# Altium PCB RAD-B00-V00.PcbDoc
Units mm, origin at the board's own origin, x right, y up, seen from the top; angles counter-clockwise.
Board outline 220 x 190 mm, 4 copper layers (Top Layer, Layer 1, Layer 2, Bottom Layer), stack 1.782 mm thick; 6 components, 0 nets, 606 pads, 0 vias.
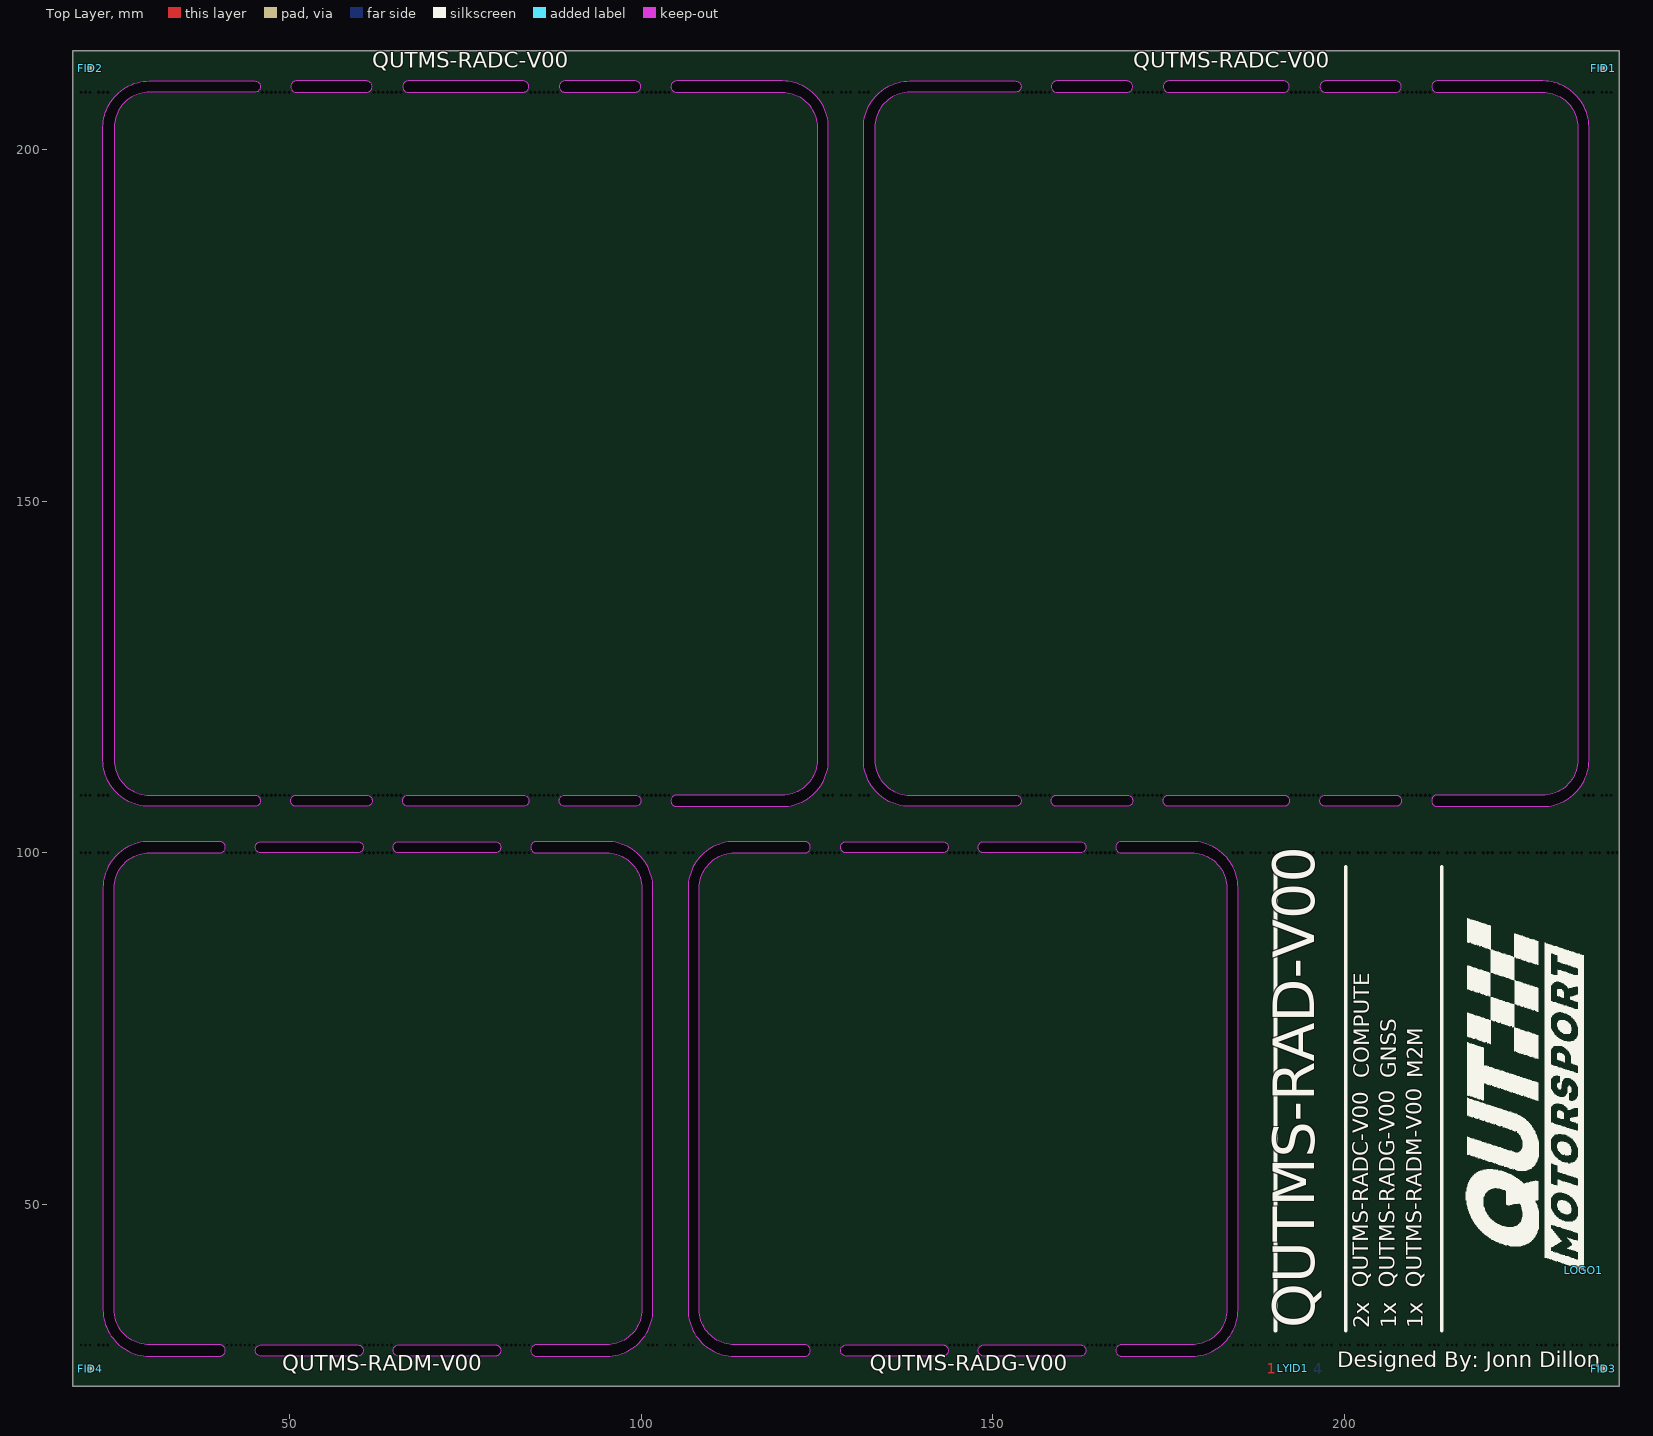
[diagram p0: Top Layer view]
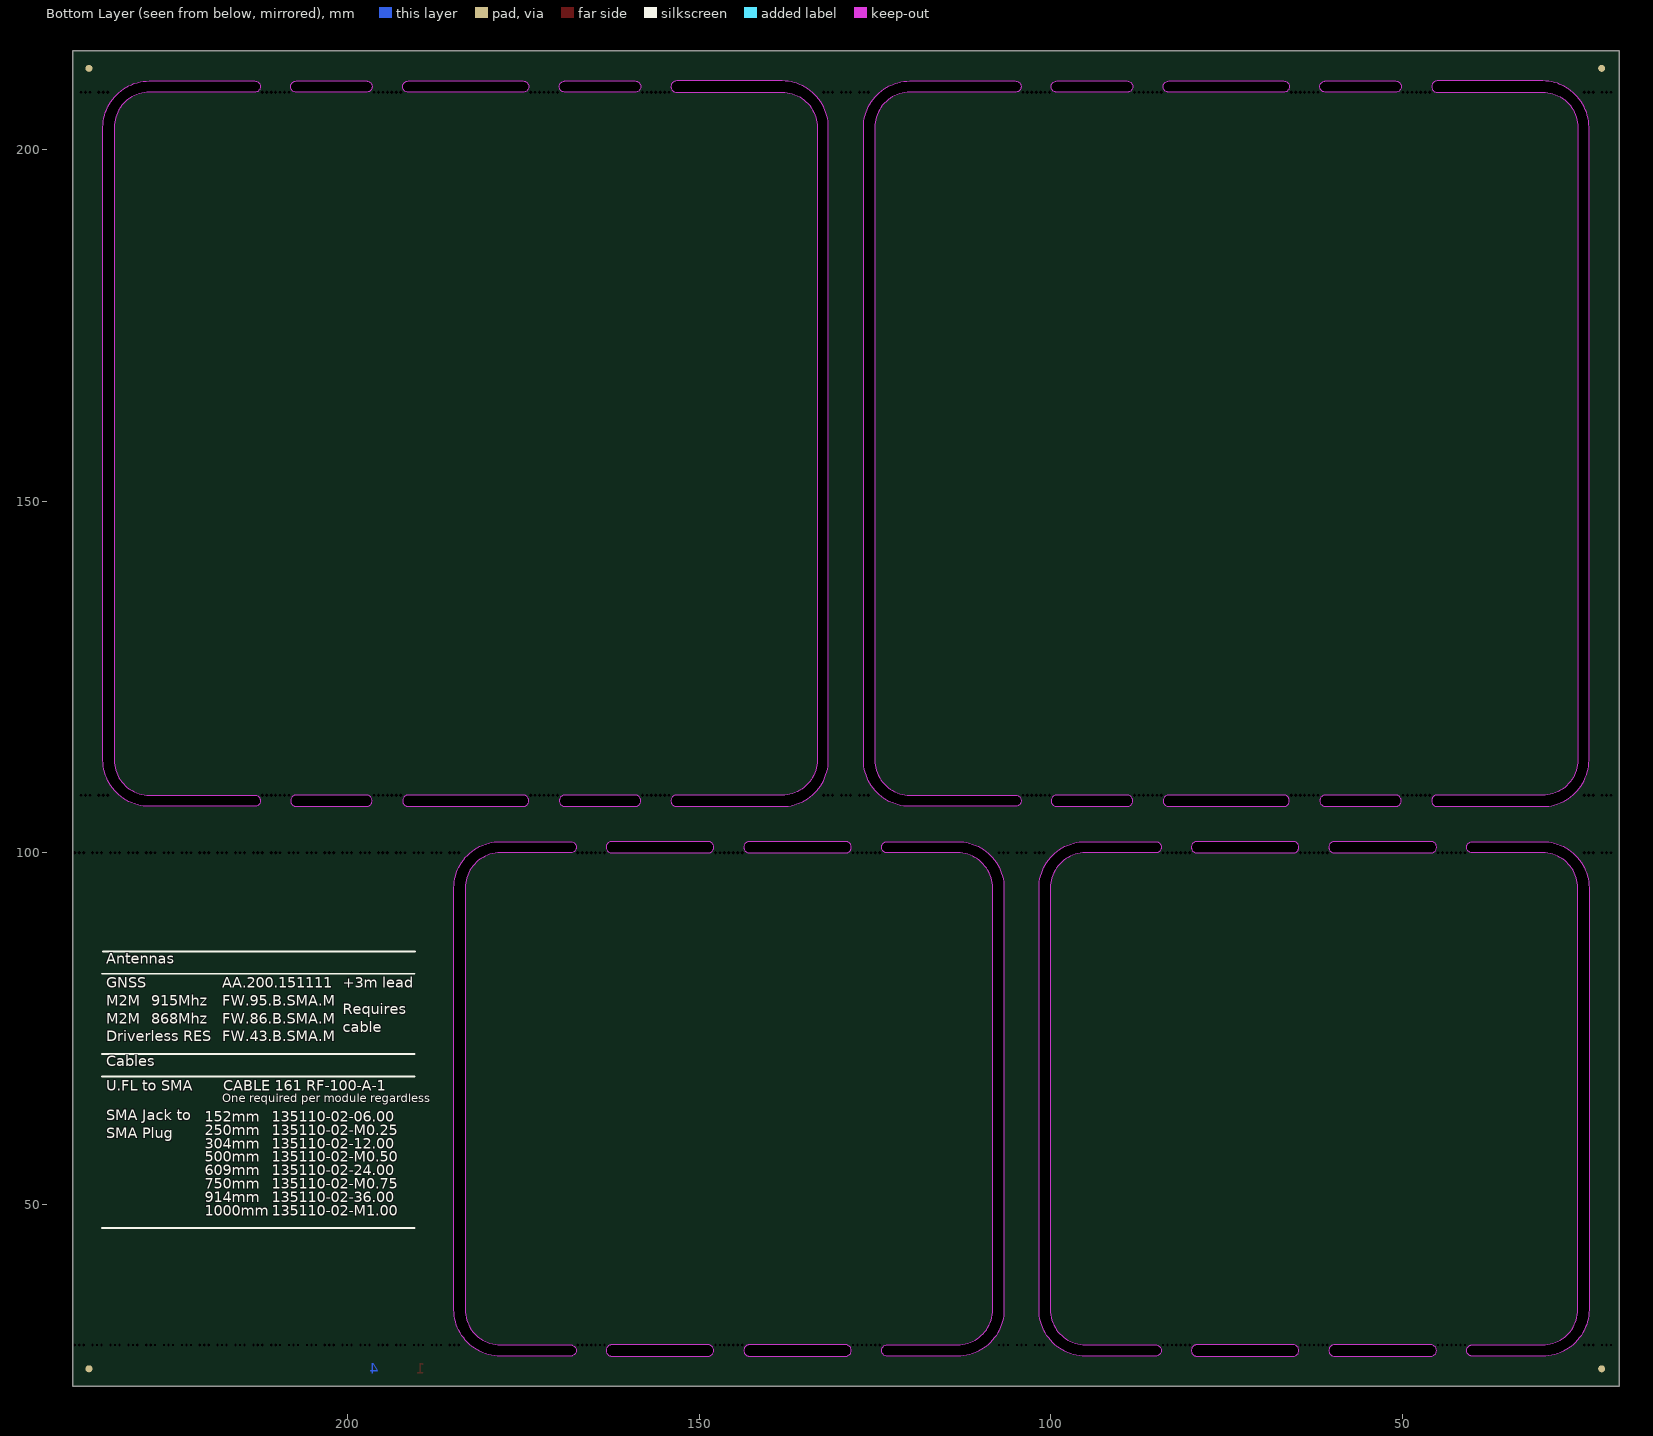
[diagram p1: Bottom Layer view, seen from below]
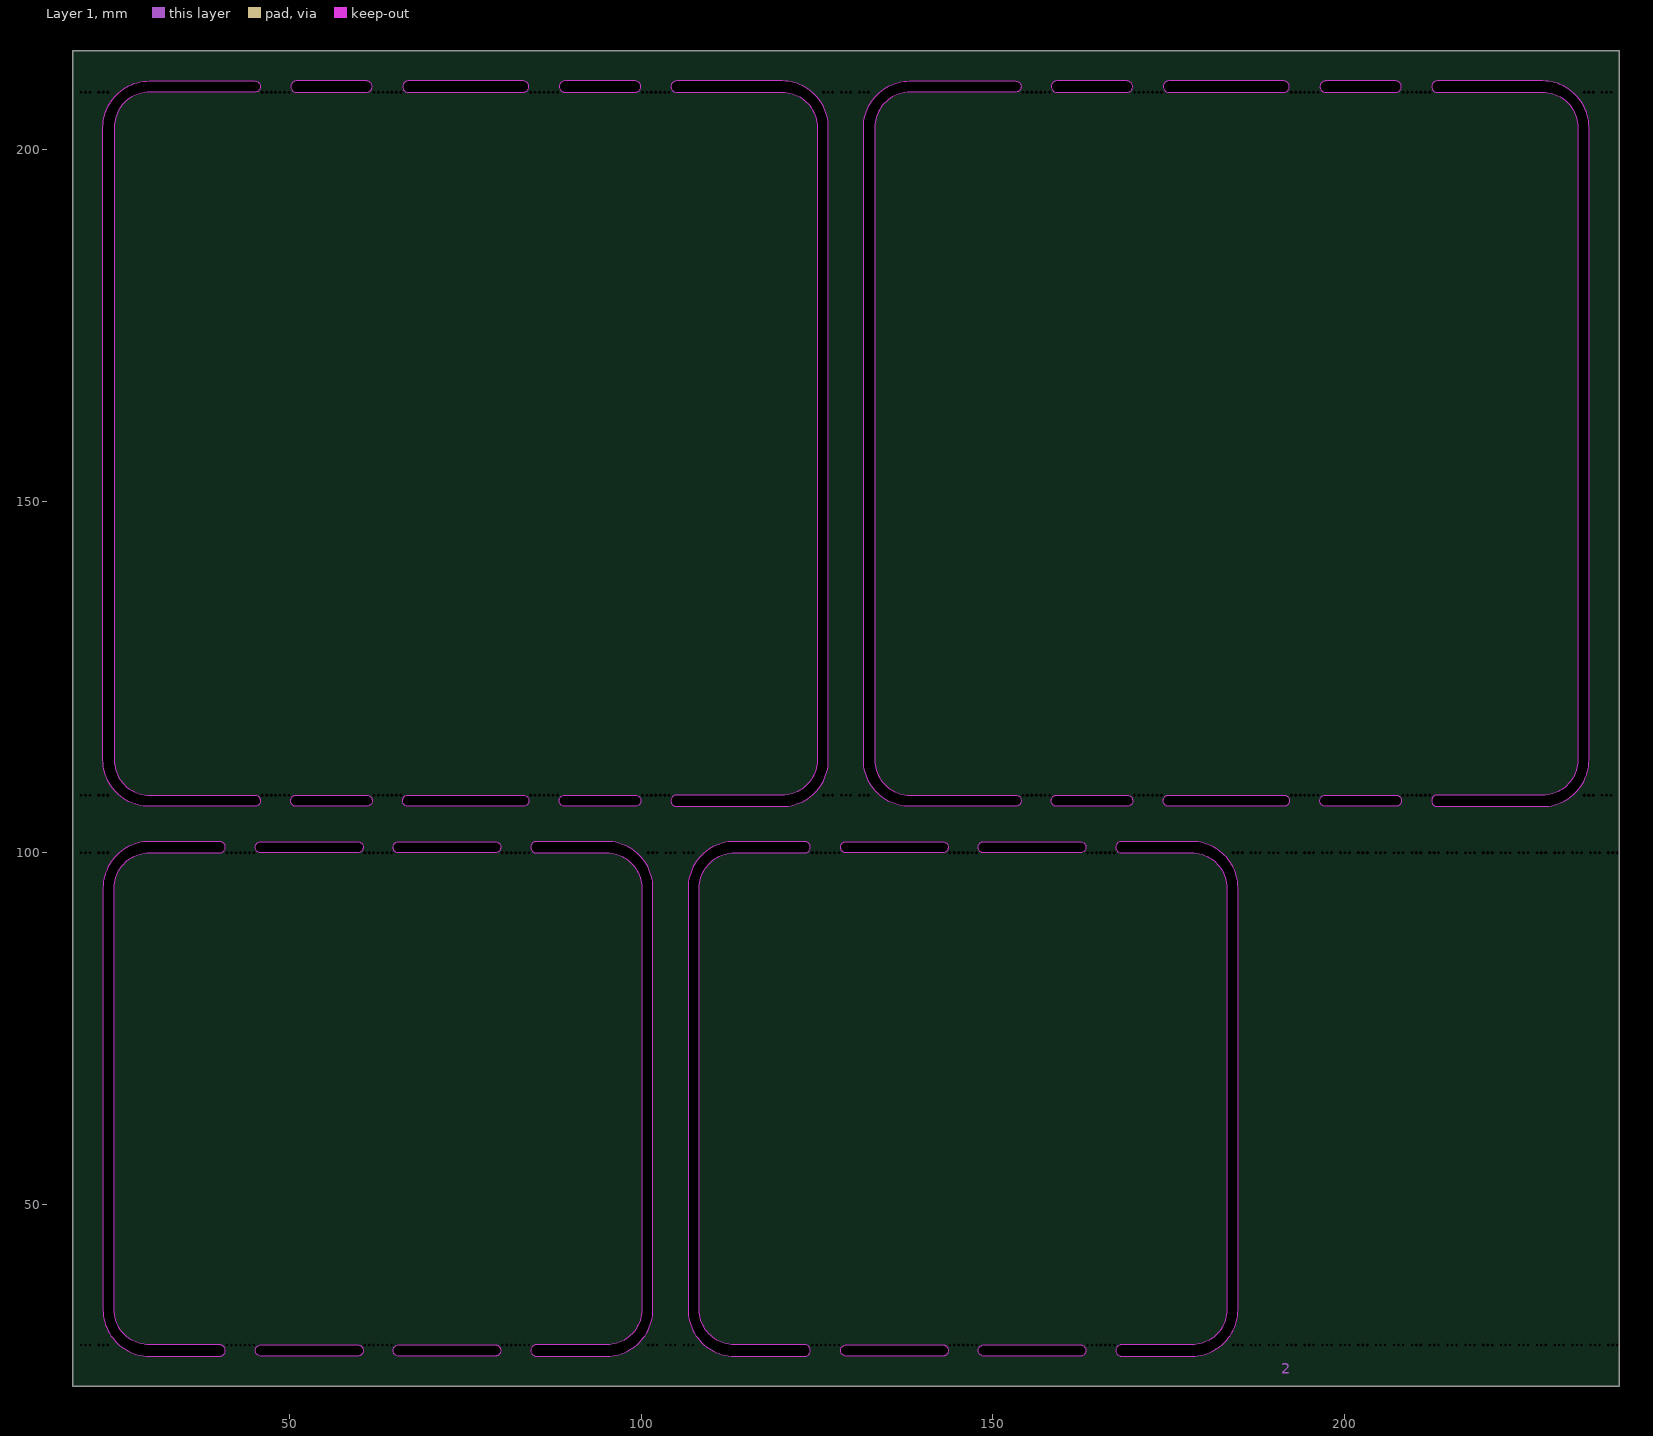
[diagram p2: Layer 1]
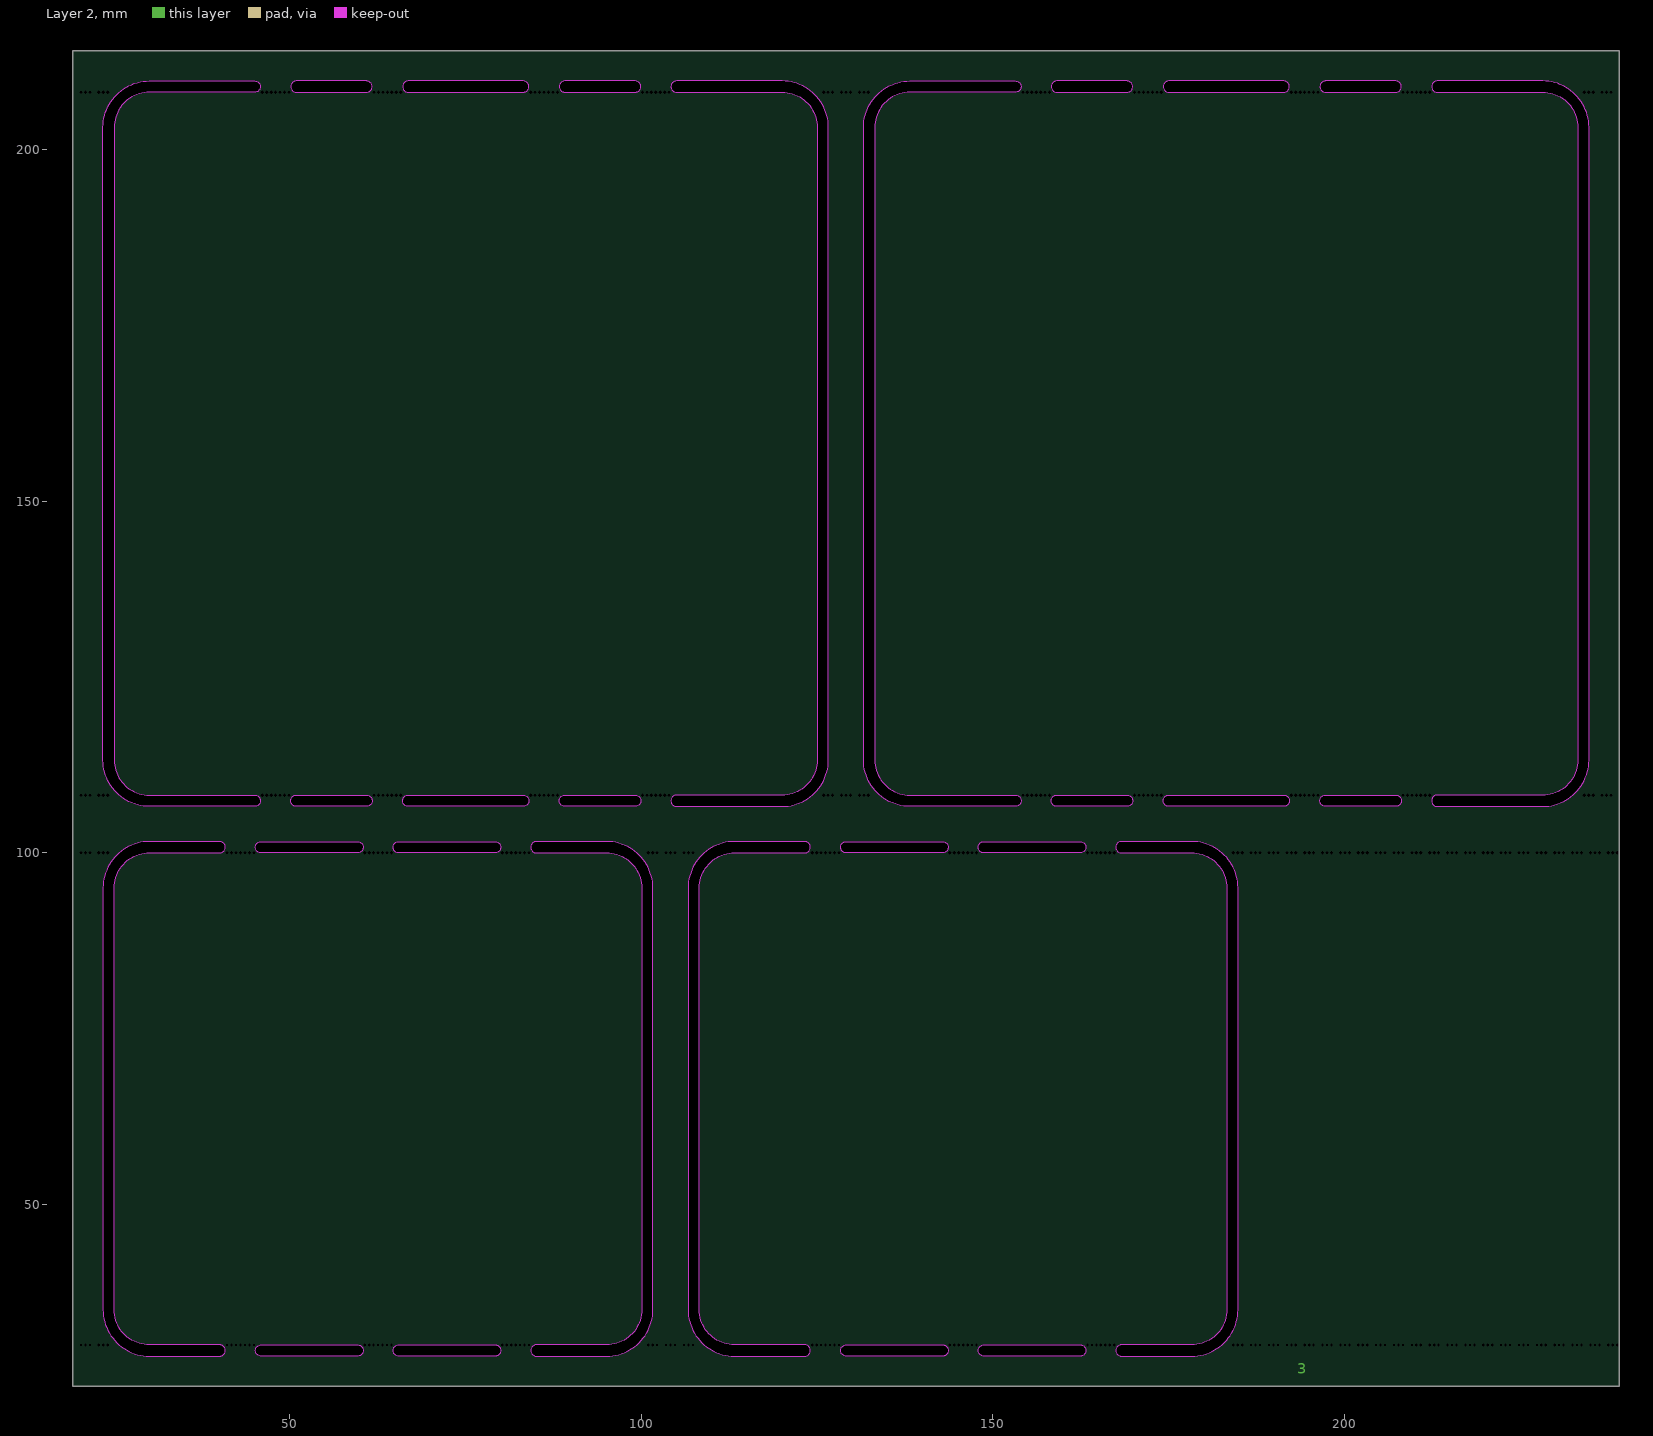
[diagram p3: Layer 2]

## Layer stack, top to bottom
Top Solder: solder mask 0.0102, Solder Resist, Dk 3.5
Top Layer: signal copper 0.0356
Dielectric 2: prepreg 0.0711, PP-006, Dk 4.1
Layer 1: signal copper 0.035
Dielectric 1: core 1.4986, Core-043, Dk 4.3
Layer 2: signal copper 0.035
Dielectric 3: prepreg 0.0711, PP-006, Dk 4.1
Bottom Layer: signal copper 0.0356
Bottom Solder: solder mask 0.0102, Solder Resist, Dk 3.5

## Board outline
19.1,24.1 239.1,24.1 239.1,214.1 19.1,214.1
cut-out: 50.889,209.8 ccw(c50.889,209) 50.889,208.2 60.889,208.2 ccw(c60.889,209) 61.689,209 ccw(c60.889,209) 60.889,209.8
cut-out: 66.815,209.8 ccw(c66.815,209) 66.815,208.2 83.185,208.2 ccw(c83.185,209) 83.985,209 ccw(c83.185,209) 83.185,209.8
cut-out: 89.111,209.8 ccw(c89.111,209) 89.111,208.2 99.111,208.2 ccw(c99.111,209) 99.911,209 ccw(c99.111,209) 99.111,209.8
cut-out: 159.089,209.8 ccw(c159.089,209) 159.089,208.2 169.089,208.2 ccw(c169.089,209) 169.889,209 ccw(c169.089,209) 169.089,209.8
cut-out: 175.015,209.8 ccw(c175.015,209) 175.015,208.2 191.385,208.2 ccw(c191.385,209) 192.185,209 ccw(c191.385,209) 191.385,209.8
cut-out: 197.311,209.8 ccw(c197.311,209) 197.311,208.2 207.311,208.2 ccw(c207.311,209) 208.111,209 ccw(c207.311,209) 207.311,209.8
cut-out: 159.089,106.6 cw(c159.089,107.4) 159.089,108.2 169.089,108.2 cw(c169.089,107.4) 169.889,107.4 cw(c169.089,107.4) 169.089,106.6
cut-out: 175.015,106.6 cw(c175.015,107.4) 175.015,108.2 191.385,108.2 cw(c191.385,107.4) 192.185,107.4 cw(c191.385,107.4) 191.385,106.6
cut-out: 197.311,106.6 cw(c197.311,107.4) 197.311,108.2 207.311,108.2 cw(c207.311,107.4) 208.111,107.4 cw(c207.311,107.4) 207.311,106.6
cut-out: 89.111,106.6 cw(c89.111,107.4) 89.111,108.2 99.111,108.2 cw(c99.111,107.4) 99.911,107.4 cw(c99.111,107.4) 99.111,106.6
cut-out: 66.815,106.6 cw(c66.815,107.4) 66.815,108.2 83.185,108.2 cw(c83.185,107.4) 83.985,107.4 cw(c83.185,107.4) 83.185,106.6
cut-out: 50.889,106.6 cw(c50.889,107.4) 50.889,108.2 60.889,108.2 cw(c60.889,107.4) 61.689,107.4 cw(c60.889,107.4) 60.889,106.6
cut-out: 153.2,106.6 138.2,106.6 cw(c138.2,113.2) 131.6,113.2 cw(c132.4,113.2) 131.6,113.203 131.6,203.2 cw(c138.2,203.2) 138.2,209.8 153.2,209.8 cw(c153.2,209) 153.2,208.2 138.2,208.2 ccw(c138.2,203.2) 133.2,203.2 133.2,113.2 cw(c132.4,113.2) 133.2,113.197 cw(c138.2,113.2) 133.2,113.2 133.2,113.197 ccw(c138.2,113.2) 138.2,108.2 153.2,108.2 cw(c153.2,107.4)
cut-out: 213.2,106.6 228.2,106.6 ccw(c228.2,113.2) 234.8,113.2 ccw(c234,113.2) 234.8,113.203 234.8,203.2 ccw(c228.2,203.2) 228.2,209.8 213.2,209.8 ccw(c213.2,209) 213.2,208.2 228.2,208.2 cw(c228.2,203.2) 233.2,203.2 233.2,113.2 ccw(c234,113.2) 233.2,113.197 ccw(c228.2,113.2) 233.2,113.2 233.2,113.197 cw(c228.2,113.2) 228.2,108.2 213.2,108.2 ccw(c213.2,107.4)
cut-out: 45,106.6 30,106.6 cw(c30,113.2) 23.4,113.2 cw(c24.2,113.2) 23.4,113.203 23.4,203.2 cw(c30,203.2) 30,209.8 45,209.8 cw(c45,209) 45,208.2 30,208.2 ccw(c30,203.2) 25,203.2 25,113.2 cw(c24.2,113.2) 25,113.197 cw(c30,113.2) 25,113.2 25,113.197 ccw(c30,113.2) 30,108.2 45,108.2 cw(c45,107.4)
cut-out: 105,106.6 120,106.6 ccw(c120,113.2) 126.6,113.2 ccw(c125.8,113.2) 126.6,113.203 126.6,203.2 ccw(c120,203.2) 120,209.8 105,209.8 ccw(c105,209) 105,208.2 120,208.2 cw(c120,203.2) 125,203.2 125,113.2 ccw(c125.8,113.2) 125,113.197 ccw(c120,113.2) 125,113.2 125,113.197 cw(c120,113.2) 120,108.2 105,108.2 ccw(c105,107.4)
cut-out: 23.4,35 ccw(c30,35) 30,28.4 40,28.4 ccw(c40,29.2) 40.8,29.2 ccw(c40,29.2) 40,30 30,30 cw(c30,35) 25,35 25,95 cw(c30,95) 30,100 40,100 ccw(c40,100.8) 40.8,100.8 ccw(c40,100.8) 40,101.6 30,101.6 ccw(c30,95) 23.4,95
cut-out: 45.889,28.4 cw(c45.889,29.2) 45.889,30 59.611,30 cw(c59.611,29.2) 60.411,29.2 cw(c59.611,29.2) 59.611,28.4
cut-out: 65.463,28.4 cw(c65.463,29.2) 65.463,30 79.185,30 cw(c79.185,29.2) 79.985,29.2 cw(c79.185,29.2) 79.185,28.4
cut-out: 85.037,28.4 95.037,28.4 ccw(c95.037,35) 101.637,35 ccw(c100.837,35) 101.637,35.002 101.637,95 cw(c100.837,95) 101.637,94.998 101.637,95 ccw(c95.037,95) 95.037,101.6 85.037,101.6 ccw(c85.037,100.8) 85.037,100 95.037,100 cw(c95.037,95) 100.037,95.002 cw(c95.037,95) 100.037,95 cw(c100.837,95) 100.037,95.002 100.037,95 100.037,35 ccw(c100.837,35) 100.037,34.998 ccw(c95.037,35) 100.037,35 100.037,34.998 cw(c95.037,35) 95.037,30 85.037,30 ccw(c85.037,29.2)
cut-out: 45.889,100 cw(c45.889,100.8) 45.889,101.6 59.611,101.6 cw(c59.611,100.8) 60.411,100.8 cw(c59.611,100.8) 59.611,100
cut-out: 65.463,100 cw(c65.463,100.8) 65.463,101.6 79.185,101.6 cw(c79.185,100.8) 79.985,100.8 cw(c79.185,100.8) 79.185,100
cut-out: 148.7,100 cw(c148.7,100.8) 148.7,101.6 162.422,101.6 cw(c162.422,100.8) 163.222,100.8 cw(c162.422,100.8) 162.422,100
cut-out: 129.126,100 cw(c129.126,100.8) 129.126,101.6 142.848,101.6 cw(c142.848,100.8) 143.648,100.8 cw(c142.848,100.8) 142.848,100
cut-out: 168.274,28.4 178.274,28.4 ccw(c178.274,35) 184.874,35 ccw(c184.074,35) 184.874,35.002 184.874,95 cw(c184.074,95) 184.874,94.998 184.874,95 ccw(c178.274,95) 178.274,101.6 168.274,101.6 ccw(c168.274,100.8) 168.274,100 178.274,100 cw(c178.274,95) 183.274,95.002 cw(c178.274,95) 183.274,95 cw(c184.074,95) 183.274,95.002 183.274,95 183.274,35 ccw(c184.074,35) 183.274,34.998 ccw(c178.274,35) 183.274,35 183.274,34.998 cw(c178.274,35) 178.274,30 168.274,30 ccw(c168.274,29.2)
cut-out: 148.7,28.4 cw(c148.7,29.2) 148.7,30 162.422,30 cw(c162.422,29.2) 163.222,29.2 cw(c162.422,29.2) 162.422,28.4
cut-out: 129.126,28.4 cw(c129.126,29.2) 129.126,30 142.848,30 cw(c142.848,29.2) 143.648,29.2 cw(c142.848,29.2) 142.848,28.4
cut-out: 106.637,35 ccw(c113.237,35) 113.237,28.4 123.237,28.4 ccw(c123.237,29.2) 124.037,29.2 ccw(c123.237,29.2) 123.237,30 113.237,30 cw(c113.237,35) 108.237,35 108.237,95 cw(c113.237,95) 113.237,100 123.237,100 ccw(c123.237,100.8) 124.037,100.8 ccw(c123.237,100.8) 123.237,101.6 113.237,101.6 ccw(c113.237,95) 106.637,95

## Design rules (kind name [scope] priority, off if disabled: settings)
Clearance [All] p1: gap=0.254 ignorepadtopadclearanceinfootprint=FALSE except(0: Arc-Hole Track-Hole SMDPad-Hole THPad-Hole Via-Hole Fill-Hole Poly-Hole Region-Hole Text-Hole)
PolygonConnect [All] p1: connectstyle=Relief reliefconductorwidth=0.254 reliefentries=4 polygonreliefangle="90 Angle" airgapwidth=0.254
RoutingVias [All] p1: holewidth=0.711 width=1.27 viastyle="Through Hole" minholewidth=0.711 minwidth=1.27 maxholewidth=0.711 maxwidth=1.27
SolderMaskExpansion [All] p1: expansion=0.102 istentingtop=FALSE
Width [All] p1: maxlimit=0.254 minlimit=0.254 preferedwidth=0.254
30 further rules are at their usual default settings.

## Components (designator, comment, footprint, x,y, rotation, side; value= is the part's Value field where it differs from the comment)
FID1 "Fiducial 1MM" "FIDUCIAL 1MM" 236.8,211.6 r0 top
FID2 "Fiducial 1MM" "FIDUCIAL 1MM" 21.6,211.6 r90 top
FID3 "Fiducial 1MM" "FIDUCIAL 1MM" 236.8,26.6 r90 top
FID4 "Fiducial 1MM" "FIDUCIAL 1MM" 21.6,26.6 r90 top
LOGO1 "50mm Wide QUTMS Logo" "QUTMS LOGO 50MM" 234.061,40.64 r90 top
LYID1 "4 Layer Identification PCB Marker" "LAYER IDENT 4" 192.659,26.67 r0 top

## Footprints (in the part's own frame and the unit in brackets; to place one, negate y for a bottom-side part, rotate by r counter-clockwise, add the part's x,y. Pads: shape width x height; smd on the part's side, far side on the other; paste and mask are expansions set on the pad)
"FIDUCIAL 1MM" [mm]
  round 1 smd mask+1: 1(0,0)
  round 1 smd far side mask+1: 1(0,0)
  Top Layer pour cut-out: 0.003,-1.516 -0.579,-1.4 -1.073,-1.07 -1.403,-0.577 -1.518,0.006 -1.518,0.006 -1.403,0.588 -1.073,1.081 -0.579,1.411 0.003,1.527 0.003,1.527 0.585,1.411 1.078,1.081 1.408,0.588 1.524,0.006 1.524,0.006 1.408,-0.577 1.078,-1.07 0.585,-1.4 0.003,-1.516
  Bottom Layer pour cut-out: 0.003,-1.516 -0.579,-1.4 -1.073,-1.07 -1.403,-0.577 -1.518,0.006 -1.518,0.006 -1.315,0.766 -0.758,1.323 0.003,1.527 0.003,1.527 0.585,1.411 1.078,1.081 1.408,0.588 1.524,0.006 1.524,0.006 1.408,-0.577 1.078,-1.07 0.585,-1.4 0.003,-1.516
"LAYER IDENT 4" [mm]
  Top Layer pour cut-out: -4.572,1.27 -4.572,-1.27 4.572,-1.27 4.572,1.27
  Layer 1 pour cut-out: -4.572,1.27 -4.572,-1.27 4.572,-1.27 4.572,1.27
  Layer 2 pour cut-out: -4.572,1.27 -4.572,-1.27 4.572,-1.27 4.572,1.27
  Bottom Layer pour cut-out: -4.572,1.27 -4.572,-1.27 4.572,-1.27 4.572,1.27
"QUTMS LOGO 50MM" [mm]
  silkscreen extent 0.01,0 50.03,16.76

## Part data
LOGO1: library part "QUTMS Logo 50mm"
LYID1: library part "Layer Identification 4"

## Free pads (board coordinates)
  rect 0x0 hole 0.45 unplated: 6(20.265,30) 6(20.265,100) 6(20.265,108.2) 6(20.265,208.2) 6(20.9,30) 6(20.9,100) 6(20.9,108.2) 6(20.9,208.2) 6(21.535,30) 6(21.535,100) 6(21.535,108.2) 6(21.535,208.2) 6(22.805,30) 6(22.805,100) 6(22.805,108.2) 6(22.805,208.2) 6(23.44,30) 6(23.44,100) 6(23.44,108.2) 6(23.44,208.2) 6(24.075,30) 6(24.075,100) 6(24.075,108.2) 6(24.075,208.2) 6(41.058,30) 6(41.058,100) 6(41.693,30) 6(41.693,100) 6(42.328,30) 6(42.328,100) 6(42.963,30) 6(42.963,100) 6(43.598,30) 6(43.598,100) 6(44.233,30) 6(44.233,100) 6(44.868,30) 6(44.868,100) 6(46.058,108.2) 6(46.058,208.2) 6(46.693,108.2) 6(46.693,208.2) 6(47.328,108.2) 6(47.328,208.2) 6(47.963,108.2) 6(47.963,208.2) 6(48.598,108.2) 6(48.598,208.2) 6(49.233,108.2) 6(49.233,208.2) 6(49.868,108.2) 6(49.868,208.2) 6(60.632,30) 6(60.632,100) 6(61.267,30) 6(61.267,100) 6(61.902,30) 6(61.902,100) 6(61.947,108.2) 6(61.947,208.2) 6(62.582,108.2) 6(62.582,208.2) 6(63.172,30) 6(63.172,100) 6(63.217,108.2) 6(63.217,208.2) 6(63.807,30) 6(63.807,100) 6(63.852,108.2) 6(63.852,208.2) 6(64.442,30) 6(64.442,100) 6(64.487,108.2) 6(64.487,208.2) 6(65.122,108.2) 6(65.122,208.2) 6(80.206,30) 6(80.206,100) 6(80.841,30) 6(80.841,100) 6(81.476,30) 6(81.476,100) 6(82.111,30) 6(82.111,100) 6(82.746,30) 6(82.746,100) 6(83.381,30) 6(83.381,100) 6(84.016,30) 6(84.016,100) 6(84.243,108.2) 6(84.243,208.2) 6(84.878,108.2) 6(84.878,208.2) 6(85.513,108.2) 6(85.513,208.2) 6(86.148,108.2) 6(86.148,208.2) 6(86.783,108.2) 6(86.783,208.2) 6(87.418,108.2) 6(87.418,208.2) 6(88.053,108.2) 6(88.053,208.2) 6(100.132,108.2) 6(100.132,208.2) 6(100.767,108.2) 6(100.767,208.2) 6(100.962,30) 6(100.962,100) 6(101.402,108.2) 6(101.402,208.2) 6(101.597,30) 6(101.597,100) 6(102.037,108.2) 6(102.037,208.2) 6(102.232,30) 6(102.232,100) 6(102.672,108.2) 6(102.672,208.2) 6(103.307,108.2) 6(103.307,208.2) 6(103.502,30) 6(103.502,100) 6(103.942,108.2) 6(103.942,208.2) 6(104.137,30) 6(104.137,100) 6(104.772,30) 6(104.772,100) 6(106.042,30) 6(106.042,100) 6(106.677,30) 6(106.677,100) 6(107.312,30) 6(107.312,100) 6(124.295,30) 6(124.295,100) 6(124.93,30) 6(124.93,100) 6(125.565,30) 6(125.565,100) 6(125.925,108.2) 6(125.925,208.2) 6(126.2,30) 6(126.2,100) 6(126.56,108.2) 6(126.56,208.2) 6(126.835,30) 6(126.835,100) 6(127.195,108.2) 6(127.195,208.2) 6(127.47,30) 6(127.47,100) 6(128.105,30) 6(128.105,100) 6(128.465,108.2) 6(128.465,208.2) 6(129.1,108.2) 6(129.1,208.2) 6(129.735,108.2) 6(129.735,208.2) 6(131.005,108.2) 6(131.005,208.2) 6(131.64,108.2) 6(131.64,208.2) 6(132.275,108.2) 6(132.275,208.2) 6(143.869,30) 6(143.869,100) 6(144.504,30) 6(144.504,100) 6(145.139,30) 6(145.139,100) 6(146.409,30) 6(146.409,100) 6(147.044,30) 6(147.044,100) 6(147.679,30) 6(147.679,100) 6(154.258,108.2) 6(154.258,208.2) 6(154.893,108.2) 6(154.893,208.2) 6(155.528,108.2) 6(155.528,208.2) 6(156.163,108.2) 6(156.163,208.2) 6(156.798,108.2) 6(156.798,208.2) 6(157.433,108.2) 6(157.433,208.2) 6(158.068,108.2) 6(158.068,208.2) 6(163.443,30) 6(163.443,100) 6(164.078,30) 6(164.078,100) 6(164.713,30) 6(164.713,100) 6(165.348,30) 6(165.348,100) 6(165.983,30) 6(165.983,100) 6(166.618,30) 6(166.618,100) 6(167.253,30) 6(167.253,100) 6(170.147,108.2) 6(170.147,208.2) 6(170.782,108.2) 6(170.782,208.2) 6(171.417,108.2) 6(171.417,208.2) 6(172.052,108.2) 6(172.052,208.2) 6(172.687,108.2) 6(172.687,208.2) 6(173.322,108.2) 6(173.322,208.2) 6(184.199,30) 6(184.199,100) 6(184.834,30) 6(184.834,100) 6(185.469,30) 6(185.469,100) 6(186.739,30) 6(186.739,100) 6(187.374,30) 6(187.374,100) 6(188.009,30) 6(188.009,100) 6(189.279,30) 6(189.279,100) 6(189.914,30) 6(189.914,100) 6(190.549,30) 6(190.549,100) 6(191.819,30) 6(191.819,100) 6(192.443,108.2) 6(192.443,208.2) 6(192.454,30) 6(192.454,100) 6(193.078,108.2) 6(193.078,208.2) 6(193.089,30) 6(193.089,100) 6(193.713,108.2) 6(193.713,208.2) 6(194.348,108.2) 6(194.348,208.2) 6(194.359,30) 6(194.359,100) 6(194.983,108.2) 6(194.983,208.2) 6(194.994,30) 6(194.994,100) 6(195.618,108.2) 6(195.618,208.2) 6(195.629,30) 6(195.629,100) 6(196.253,108.2) 6(196.253,208.2) 6(196.899,30) 6(196.899,100) 6(197.534,30) 6(197.534,100) 6(198.169,30) 6(198.169,100) 6(199.439,30) 6(199.439,100) 6(200.074,30) 6(200.074,100) 6(200.709,30) 6(200.709,100) 6(201.979,30) 6(201.979,100) 6(202.614,30) 6(202.614,100) 6(203.249,30) 6(203.249,100) 6(204.519,30) 6(204.519,100) 6(205.154,30) 6(205.154,100) 6(205.789,30) 6(205.789,100) 6(207.059,30) 6(207.059,100) 6(207.694,30) 6(207.694,100) 6(208.329,30) 6(208.329,100) 6(208.332,108.2) 6(208.332,208.2) 6(208.967,108.2) 6(208.967,208.2) 6(209.599,30) 6(209.599,100) 6(209.602,108.2) 6(209.602,208.2) 6(210.234,30) 6(210.234,100) 6(210.237,108.2) 6(210.237,208.2) 6(210.869,30) 6(210.869,100) 6(210.872,108.2) 6(210.872,208.2) 6(211.507,108.2) 6(211.507,208.2) 6(212.139,30) 6(212.139,100) 6(212.142,108.2) 6(212.142,208.2) 6(212.774,30) 6(212.774,100) 6(213.409,30) 6(213.409,100) 6(214.679,30) 6(214.679,100) 6(215.314,30) 6(215.314,100) 6(215.949,30) 6(215.949,100) 6(217.219,30) 6(217.219,100) 6(217.854,30) 6(217.854,100) 6(218.489,30) 6(218.489,100) 6(219.759,30) 6(219.759,100) 6(220.394,30) 6(220.394,100) 6(221.029,30) 6(221.029,100) 6(222.299,30) 6(222.299,100) 6(222.934,30) 6(222.934,100) 6(223.569,30) 6(223.569,100) 6(224.839,30) 6(224.839,100) 6(225.474,30) 6(225.474,100) 6(226.109,30) 6(226.109,100) 6(227.379,30) 6(227.379,100) 6(228.014,30) 6(228.014,100) 6(228.649,30) 6(228.649,100) 6(229.919,30) 6(229.919,100) 6(230.554,30) 6(230.554,100) 6(231.189,30) 6(231.189,100) 6(232.459,30) 6(232.459,100) 6(233.094,30) 6(233.094,100) 6(233.729,30) 6(233.729,100) 6(234.125,108.2) 6(234.125,208.2) 6(234.76,108.2) 6(234.76,208.2) 6(234.999,30) 6(234.999,100) 6(235.395,108.2) 6(235.395,208.2) 6(235.634,30) 6(235.634,100) 6(236.269,30) 6(236.269,100) 6(236.665,108.2) 6(236.665,208.2) 6(237.3,108.2) 6(237.3,208.2) 6(237.539,30) 6(237.539,100) 6(237.935,108.2) 6(237.935,208.2) 6(238.174,30) 6(238.174,100) 6(238.809,30) 6(238.809,100) 7(20.9,30) 7(20.9,100) 7(20.9,108.2) 7(20.9,208.2) 7(41.058,30) 7(41.058,100) 7(41.693,30) 7(41.693,100) 7(42.328,30) 7(42.328,100) 7(42.963,30) 7(42.963,100) 7(43.598,30) 7(43.598,100) 7(44.233,30) 7(44.233,100) 7(44.868,30) 7(44.868,100) 7(46.058,108.2) 7(46.058,208.2) 7(46.693,108.2) 7(46.693,208.2) 7(47.328,108.2) 7(47.328,208.2) 7(47.963,108.2) 7(47.963,208.2) 7(48.598,108.2) 7(48.598,208.2) 7(49.233,108.2) 7(49.233,208.2) 7(49.868,108.2) 7(49.868,208.2) 7(60.632,30) 7(60.632,100) 7(61.267,30) 7(61.267,100) 7(61.902,30) 7(61.902,100) 7(61.947,108.2) 7(61.947,208.2) 7(62.537,30) 7(62.537,100) 7(62.582,108.2) 7(62.582,208.2) 7(63.172,30) 7(63.172,100) 7(63.217,108.2) 7(63.217,208.2) 7(63.807,30) 7(63.807,100) 7(63.852,108.2) 7(63.852,208.2) 7(64.442,30) 7(64.442,100) 7(64.487,108.2) 7(64.487,208.2) 7(65.122,108.2) 7(65.122,208.2) 7(65.757,108.2) 7(65.757,208.2) 7(80.206,30) 7(80.206,100) 7(80.841,30) 7(80.841,100) 7(81.476,30) 7(81.476,100) 7(82.111,30) 7(82.111,100) 7(82.746,30) 7(82.746,100) 7(83.381,30) 7(83.381,100) 7(84.016,30) 7(84.016,100) 7(84.243,108.2) 7(84.243,208.2) 7(84.878,108.2) 7(84.878,208.2) 7(85.513,108.2) 7(85.513,208.2) 7(86.148,108.2) 7(86.148,208.2) 7(86.783,108.2) 7(86.783,208.2) 7(87.418,108.2) 7(87.418,208.2) 7(88.053,108.2) 7(88.053,208.2) 7(100.132,108.2) 7(100.132,208.2) 7(100.767,108.2) 7(100.767,208.2) 7(101.402,108.2) 7(101.402,208.2) 7(102.037,108.2) 7(102.037,208.2) 7(102.672,108.2) 7(102.672,208.2) 7(103.307,108.2) 7(103.307,208.2) 7(103.942,108.2) 7(103.942,208.2) 7(104.137,100) 7(124.295,30) 7(124.295,100) 7(124.93,30) 7(124.93,100) 7(125.565,30) 7(125.565,100) 7(126.2,30) 7(126.2,100) 7(126.835,30) 7(126.835,100) 7(127.47,30) 7(127.47,100) 7(128.105,30) 7(128.105,100) 7(129.1,108.2) 7(129.1,208.2) 7(143.869,30) 7(143.869,100) 7(144.504,30) 7(144.504,100) 7(145.139,30) 7(145.139,100) 7(145.774,30) 7(145.774,100) 7(146.409,30) 7(146.409,100) 7(147.044,30) 7(147.044,100) 7(147.679,30) 7(147.679,100) 7(154.258,108.2) 7(154.258,208.2) 7(154.893,108.2) 7(154.893,208.2) 7(155.528,108.2) 7(155.528,208.2) 7(156.163,108.2) 7(156.163,208.2) 7(156.798,108.2) 7(156.798,208.2) 7(157.433,108.2) 7(157.433,208.2) 7(158.068,108.2) 7(158.068,208.2) 7(163.443,30) 7(163.443,100) 7(164.078,30) 7(164.078,100) 7(164.713,30) 7(164.713,100) 7(165.348,30) 7(165.348,100) 7(165.983,30) 7(165.983,100) 7(166.618,30) 7(166.618,100) 7(167.253,30) 7(167.253,100) 7(170.147,108.2) 7(170.147,208.2) 7(170.782,108.2) 7(170.782,208.2) 7(171.417,108.2) 7(171.417,208.2) 7(172.052,108.2) 7(172.052,208.2) 7(172.687,108.2) 7(172.687,208.2) 7(173.322,108.2) 7(173.322,208.2) 7(173.957,108.2) 7(173.957,208.2) 7(187.374,100) 7(192.443,108.2) 7(192.443,208.2) 7(193.078,108.2) 7(193.078,208.2) 7(193.713,108.2) 7(193.713,208.2) 7(194.348,108.2) 7(194.348,208.2) 7(194.983,108.2) 7(194.983,208.2) 7(195.618,108.2) 7(195.618,208.2) 7(196.253,108.2) 7(196.253,208.2) 7(208.332,108.2) 7(208.332,208.2) 7(208.967,108.2) 7(208.967,208.2) 7(209.602,108.2) 7(209.602,208.2) 7(210.237,108.2) 7(210.237,208.2) 7(210.872,108.2) 7(210.872,208.2) 7(211.507,108.2) 7(211.507,208.2) 7(212.142,108.2) 7(212.142,208.2) 7(237.3,108.2) 7(237.3,208.2)

## Nets (pads, with @x,y where several pads share a name; then routed paths per layer and width w, separated by ;. In a path a pad name is that pad's centre, name@x,y a point inside that pad or via, vN(x,y) a via of type N, cw(c..) or ccw(c..) an arc to the next point about the centre after c; other vN are vias at no path point)
pads on no net: FID1.1 FID2.1 FID3.1 FID4.1

## Silkscreen, mask and mechanical layers (free items; w line width, h text height)
Top Overlay:
  lines w0.5: 190.2,32 190.2,98 ; 200.2,32 200.2,98 ; 213.82,32 213.82,98
  text "QUTMS-RADC-V00" at 61.729,210.89 h3.81
  text "QUTMS-RADC-V00" at 169.929,210.89 h3.81
  text "RF modules will be damaged if antennas are closer than 50cm to each other! Damage will not be obvious in operation / code / electrically / shorts etc" at 23.777,103.039 h3.81
  text "COMPUTE" at 204.327,67.947 h3.81 r90
  text "GNSS" at 208.137,67.945 h3.81 r90
  text "M2M" at 211.963,67.945 h3.81 r90
  text "QUTMS-RADC-V00" at 204.148,38.1 h3.81 r90
  text "QUTMS-RADG-V00" at 207.958,38.1 h3.81 r90
  text "QUTMS-RADM-V00" at 211.768,38.1 h3.81 r90
  text "2x" at 204.343,32.385 h3.81 r90
  text "1x" at 208.142,32.387 h3.81 r90
  text "1x" at 211.952,32.387 h3.81 r90
  text "QUTMS-RAD-V00" at 197.729,32.367 h10.16 r90
  text "Designed By: Jonn Dillon" at 199.01,26.049 h3.81
  text "QUTMS-RADM-V00" at 48.876,25.552 h3.81
  text "QUTMS-RADG-V00" at 132.459,25.552 h3.81
Bottom Overlay:
  lines w0.254: 190.373,85.979 234.823,85.979 ; 190.5,46.609 234.95,46.609 ; 190.5,68.199 234.95,68.199 ; 190.5,71.374 234.95,71.374 ; 190.5,82.804 234.95,82.804
  text "Antennas" at 234.314,83.714 h2.54
  text "+3m lead" at 200.659,80.285 h2.54
  text "AA.200.151111" at 217.804,80.285 h2.54
  text "GNSS" at 234.315,80.285 h2.54
  text "FW.95.B.SMA.M" at 217.805,77.745 h2.54
  text "915Mhz" at 227.964,77.745 h2.54
  text "M2M" at 234.315,77.724 h2.54
  text "FW.86.B.SMA.M" at 217.805,75.205 h2.54
  text "868Mhz" at 227.965,75.205 h2.54
  text "M2M" at 234.315,75.184 h2.54
  text "Requires / cable" at 200.66,73.98 h2.54
  text "FW.43.B.SMA.M" at 217.805,72.665 h2.54
  text "Driverless RES" at 234.315,72.665 h2.54
  text "Cables" at 234.314,69.109 h2.54
  text "CABLE 161 RF-100-A-1" at 217.677,65.68 h2.54
  text "U.FL to SMA" at 234.314,65.68 h2.54
  text "One required per module regardless" at 217.804,64.105 h2.03
  text "135110-02-06.00" at 210.819,61.235 h2.54
  text "152mm" at 220.344,61.235 h2.54
  text "135110-02-M0.25" at 210.819,59.33 h2.54
  text "250mm" at 220.345,59.33 h2.54
  text "SMA Jack to  / SMA Plug" at 234.315,58.928 h2.54
  text "135110-02-12.00" at 210.819,57.425 h2.54
  text "304mm" at 220.345,57.425 h2.54
  text "135110-02-M0.50" at 210.819,55.52 h2.54
  text "500mm" at 220.345,55.52 h2.54
  text "135110-02-24.00" at 210.819,53.615 h2.54
  text "609mm" at 220.344,53.615 h2.54
  text "135110-02-M0.75" at 210.819,51.71 h2.54
  text "750mm" at 220.344,51.71 h2.54
  text "135110-02-36.00" at 210.819,49.805 h2.54
  text "914mm" at 220.344,49.79 h2.54
  text "135110-02-M1.00" at 210.819,47.9 h2.54
  text "1000mm" at 220.344,47.9 h2.54
BoardOutlines:
  drawing of 192 lines, arcs and shapes, not listed

## Panel: embedded boards
"..\QUTMS-RADIO-GPS-V00\RADG-B00-V00.PcbDoc" at 108.274,100, 1 rows x 1 columns, spacing 63.5 x 38.1, rotation 270
"..\QUTMS-RADIO-COMPUTE-V00\RADC-B00-V00.PcbDoc" at 25,108.2, 1 rows x 1 columns, spacing 63.5 x 38.1, rotation 0
"..\QUTMS-RADIO-COMPUTE-V00\RADC-B00-V00.PcbDoc" at 133.2,108.2, 1 rows x 1 columns, spacing 63.5 x 38.1, rotation 0
"..\QUTMS-RADIO-M2M-V00\RADM-B00-V00.PcbDoc" at 100,30, 1 rows x 1 columns, spacing 63.5 x 38.1, rotation 90

## Text inside footprints (layer, text, board x,y; h text height)
LYID1: Top Layer "1" at 188.976,25.908 h1.52; Bottom Layer "4" at 195.58,25.908 h1.52; Layer 2 "3" at 193.294,25.908 h1.52; Layer 1 "2" at 191.008,25.908 h1.52